# Altium PCB PCB.PcbDoc
Units mm, origin at the board's own origin, x right, y up, seen from the top; angles counter-clockwise.
Board outline 45.47 x 40.89 mm, 4 copper layers (Top Layer, Internal Plane 1, Internal Plane 2, Bottom Layer); 34 components, 42 nets, 170 pads, 22 vias.
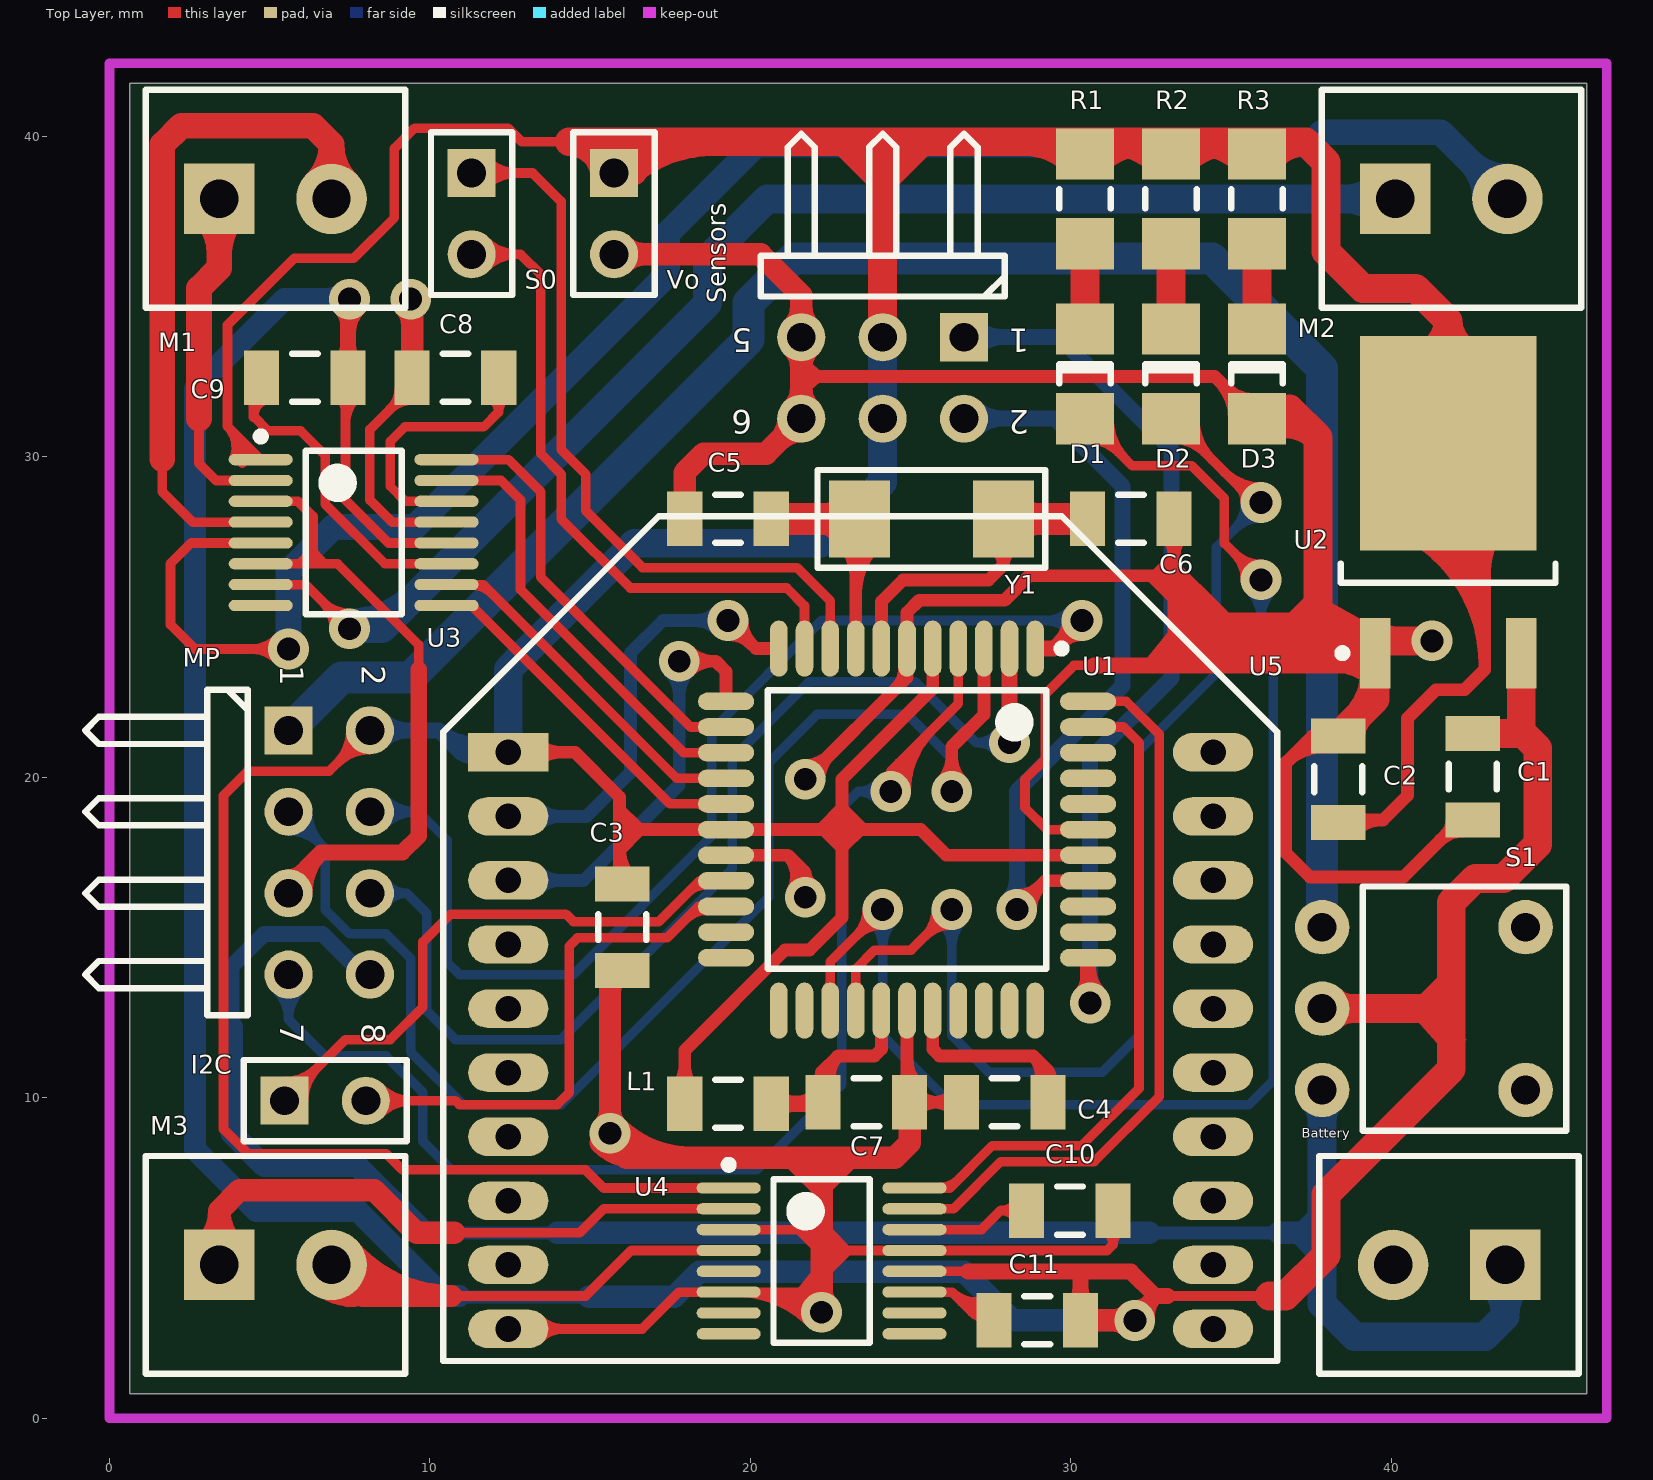
[diagram p0: Top Layer view]
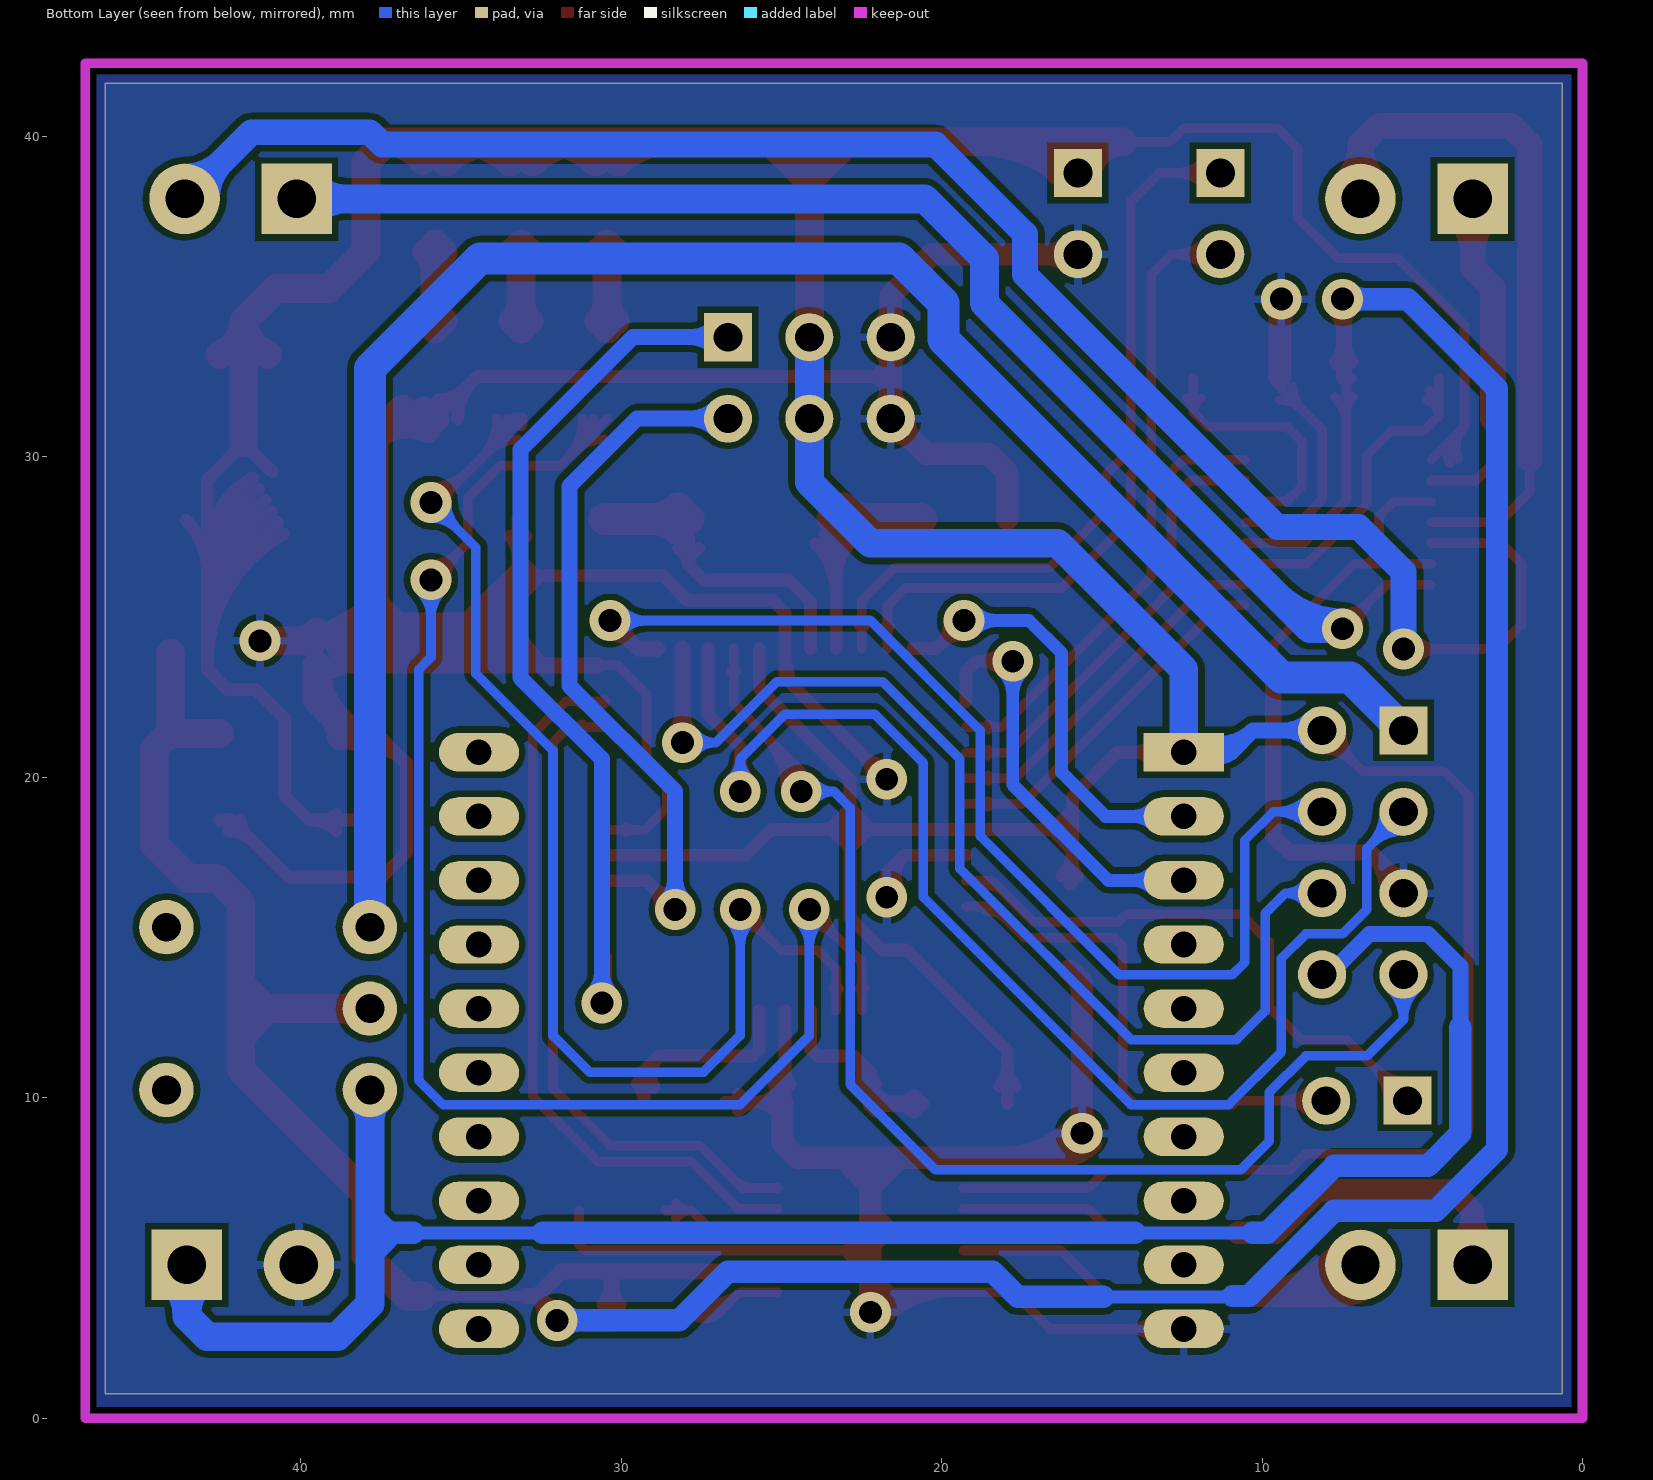
[diagram p1: Bottom Layer view, seen from below]
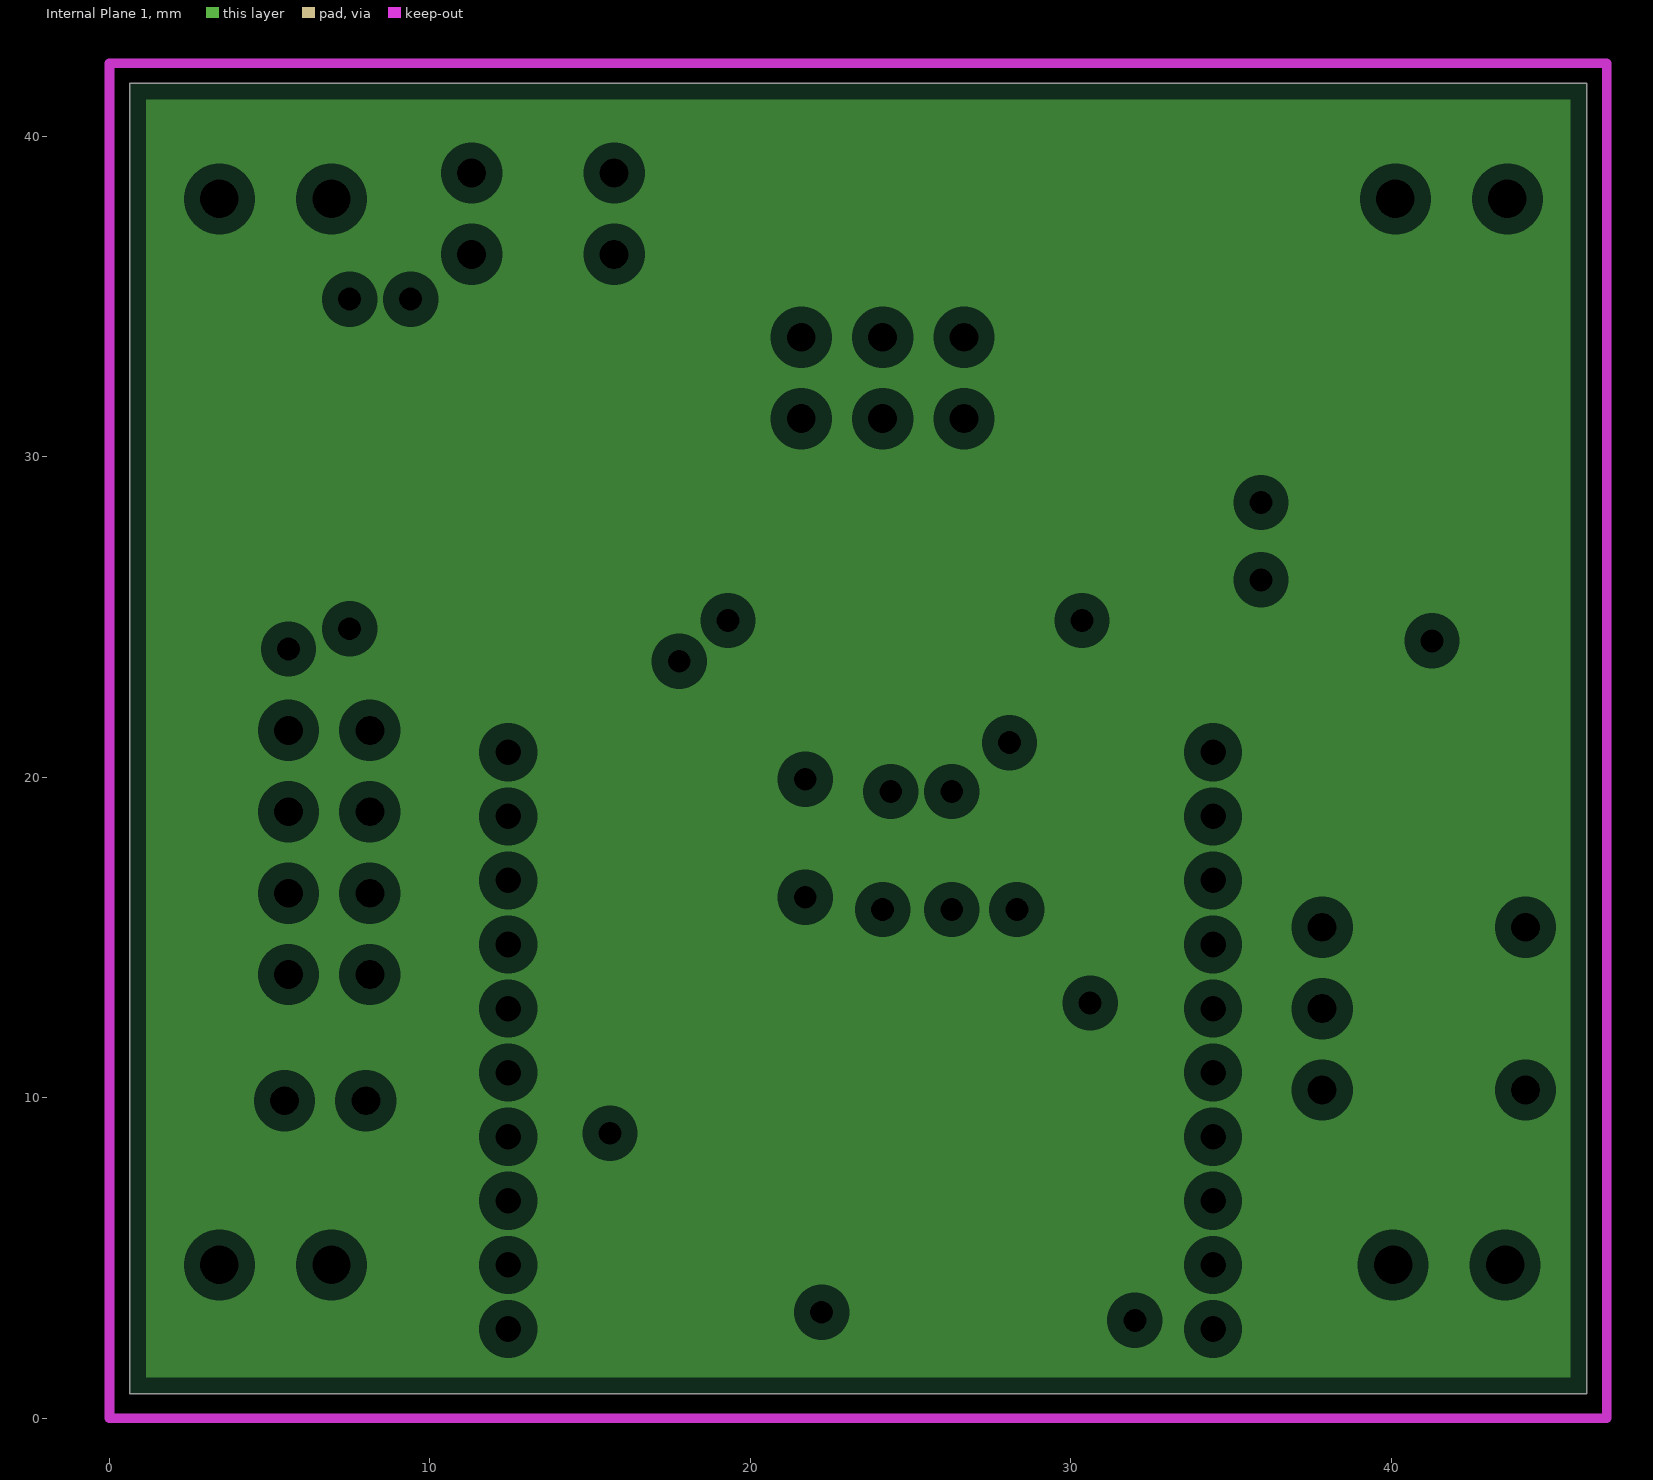
[diagram p2: Internal Plane 1, clearances drawn from the general rule]
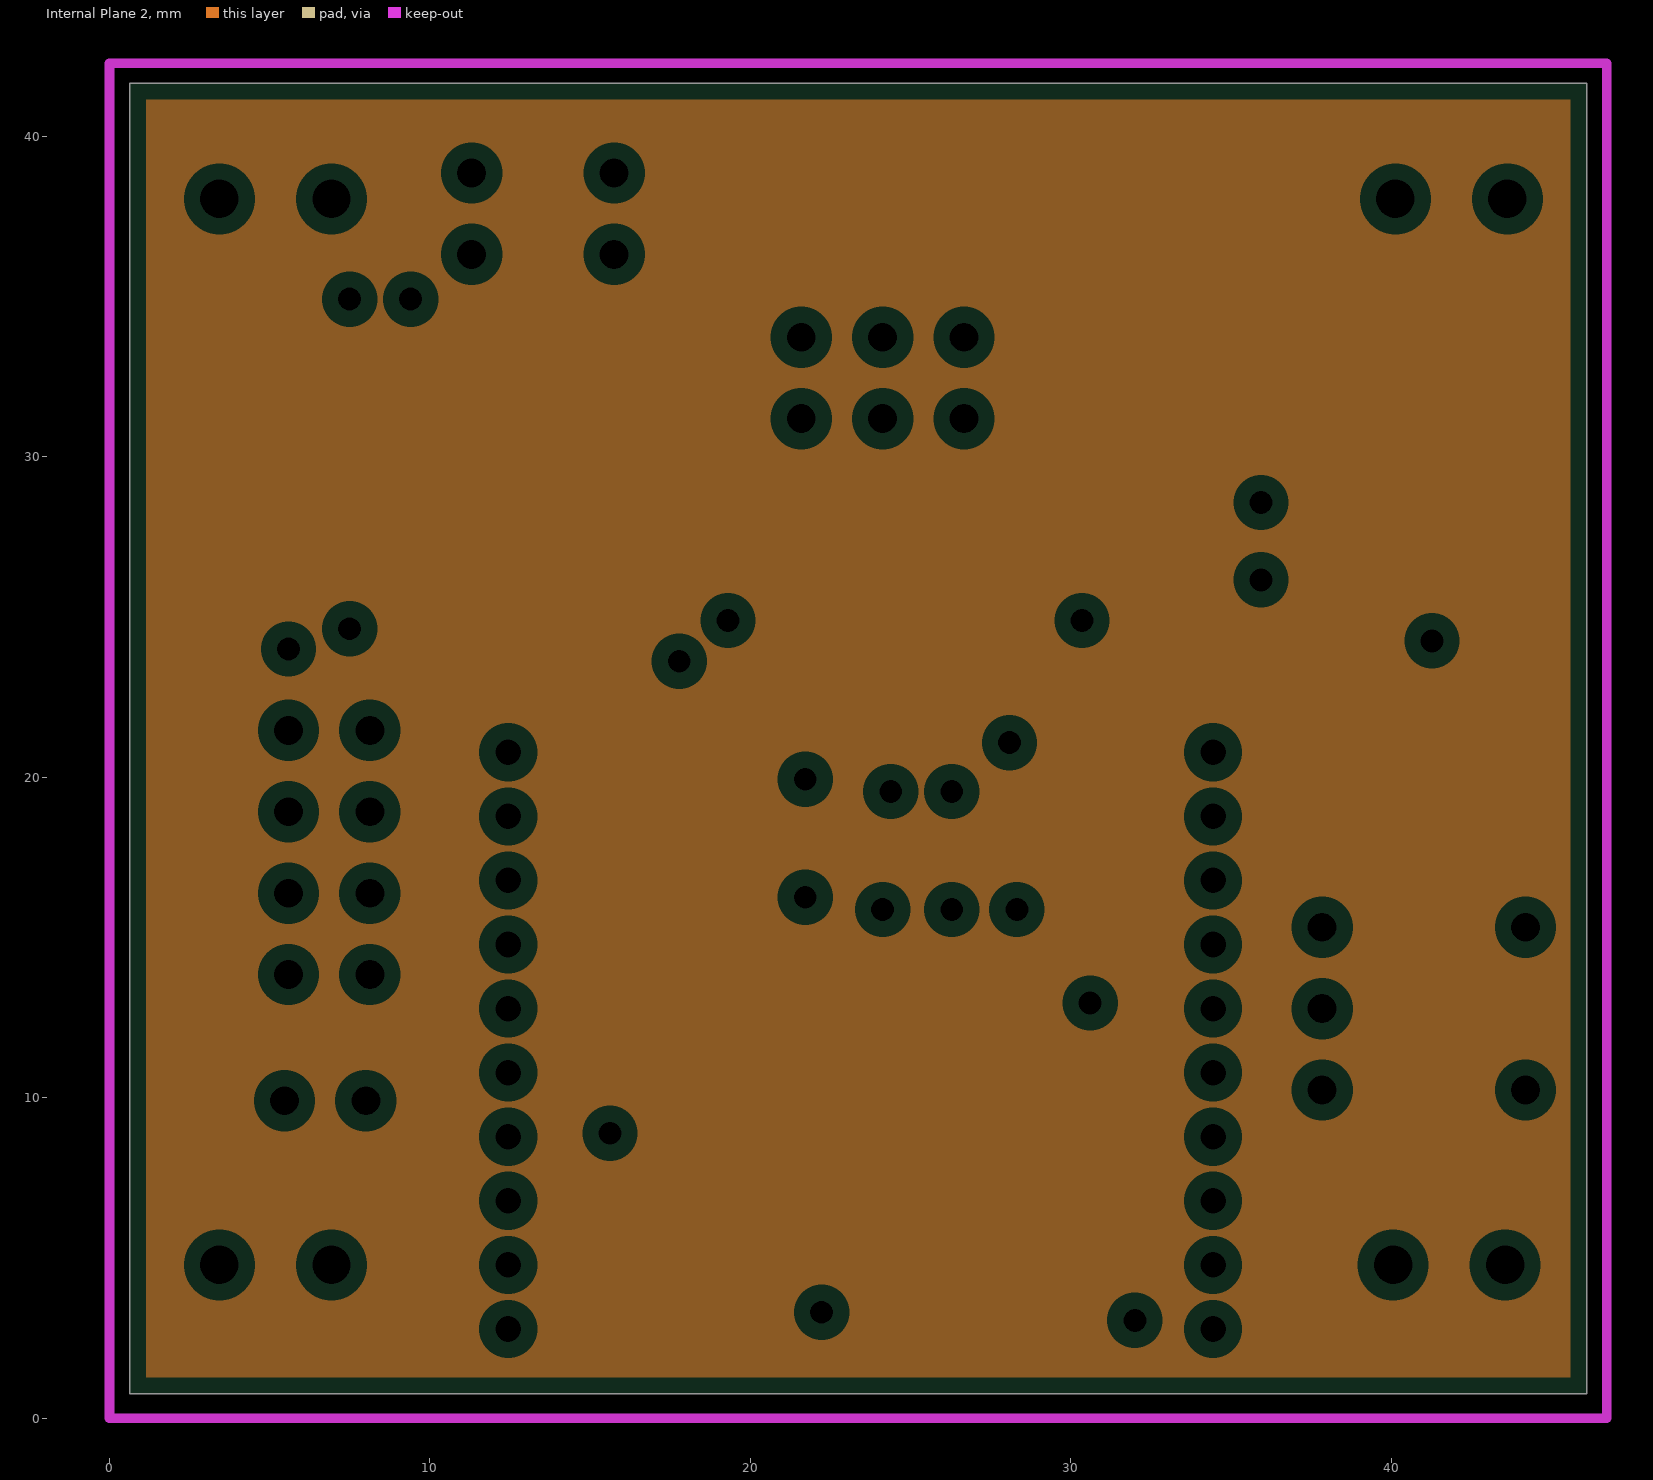
[diagram p3: Internal Plane 2, clearances drawn from the general rule]

## Layer stack, top to bottom
Top Layer: signal copper 0.0356
Dielectric: dielectric 0.32, FR-4, Dk 4.8
Internal Plane 1: plane copper 0.0356
Dielectric: dielectric 0.32, FR-4, Dk 4.8
Internal Plane 2: plane copper 0.0356
Dielectric: dielectric 0.32, FR-4, Dk 4.8
Bottom Layer: signal copper 0.0356

## Board outline
0.635,0.762 46.101,0.762 46.101,41.656 0.635,41.656

## Design rules (kind name [scope] priority, off if disabled: settings)
Clearance [All] p1: gap=0.2
ComponentClearance [All] p1 off: gap=0.254 collisioncheckmode=3 verticalgap=0.254 showdistances=FALSE
PlaneClearance [All] p1: clearance=0.508
PlaneConnect [All] p1: planeconnectstyle=Relief reliefexpansion=0.508 reliefentries=4 reliefconductorwidth=0.254 reliefairgap=0.254
PolygonConnect [All] p1: connectstyle=Relief reliefconductorwidth=0.254 reliefentries=4 polygonreliefangle="90 Angle"
RoomDefinition Schematic_v2 [InComponentClass('Schematic_v2')] p1: confinementstyle=ConfineIn formatcopy=TRUE lockcomponents=FALSE outline -1.524,0 46.736,0 46.736,42.164 -1.524,42.164
RoutingVias [All] p1: holewidth=0.6 width=1 viastyle="Through Hole" minholewidth=0.711 minwidth=1.27 maxholewidth=0.711 maxwidth=1.27
SilkscreenOverComponentPads [All] p1: minsilkscreentomaskgap=0.254
SolderMaskExpansion [All] p1: expansion=0.102
Width [All] p1: maxlimit=5 minlimit=0.3 preferedwidth=0.4 minimp=50.000000 maximp=50.000000 favimp=50.000000
24 further rules are at their usual default settings.

## Components (designator, comment, footprint, x,y, rotation, side; value= is the part's Value field where it differs from the comment)
Battery "Header 2" Terminal_2_p3.5 43.561,4.779 r180 top
C1 "Cap" C1206 42.545,20.019 r90 top
C2 "Cap" C1206 38.354,19.939 r270 top
C3 "Cap" C1206 16.002,15.32 r90 top
C4 "Cap" C1206 27.94,9.859 r180 top
C5 "Cap" C1206 19.304,28.067 r0 top
C6 "Cap" C1206 31.877,28.067 r180 top
C7 "Cap" C1206 23.622,9.859 r180 top
C8 "Cap" C1206 10.795,32.465 r180 top
C9 "Cap" C1206 6.096,32.465 r0 top
C10 "Cap" C1206 29.972,6.477 r0 top
C11 "Cap" C1206 28.956,3.048 r0 top
D1 "LED0" 1206 30.448,32.592 r270 top
D2 "LED0" 1206 33.131,32.592 r270 top
D3 "LED0" 1206 35.814,32.592 r270 top
I2C "Header 2" HDR1X2 5.461,9.906 r0 top
L1 "Inductor" C1206 19.304,9.811 r180 top
M1 "Header 2" Terminal_2_p3.5 3.429,38.053 r0 top
M2 "Header 2" Terminal_2_p3.5 40.132,38.053 r0 top
M3 "Header 2" Terminal_2_p3.5 3.429,4.779 r0 top
MP "Header 4X2H" HDR2X4H 5.588,21.463 r270 top
R1 "Res1" 8-1206 30.448,38.053 r270 top
R2 "Res1" 8-1206 33.131,38.053 r270 top
R3 "Res1" 8-1206 35.814,38.053 r270 top
S0 "Header 2" HDR1X2 11.303,38.862 r270 top
S1 "SW-SPDT" Switch_SPDT 44.196,10.24 r180 top
Sensors "Header 3X2H" HDR2X3H 26.67,33.735 r180 top
U1 "ATmega1284P-AU" 44A_N 24.892,18.368 r270 top
U2 "LD1086DT33TR" TO-252AA_M 41.783,28.274 r90 top
U3 "Dual H-Bridge Motor Driver" TSSOP16_M 7.62,27.639 r0 top
U4 "Dual H-Bridge Motor Driver" TSSOP16_M 22.225,4.906 r0 top
U5 "Xbee" Xbee_DIP 12.446,20.781 r0 top
Vo "Header 2" HDR1X2 15.748,38.862 r270 top (schematic designator Vcc_out)
Y1 "XTAL" ECX-64A 25.654,28.067 r0 top

## Footprints (in the part's own frame and the unit in brackets; to place one, negate y for a bottom-side part, rotate by r counter-clockwise, add the part's x,y. Pads: shape width x height; smd on the part's side, far side on the other; paste and mask are expansions set on the pad)
8-1206 [mm] "Chip Resistor; Body 3.1 x 1.6 mm (LxW typ)"
  rect 1.6x1.8 smd: 1(-1.4,0) 2(1.4,0)
  silkscreen extent -0.3,-0.8 0.3,0.8
44A_N [mm] "Thin QFP, 44-Leads, Body 10x10mm, Pitch 0.8mm, IPC Medium Density"
  oval 1.75x0.55 smd: 1(-5.65,4) 2(-5.65,3.2) 3(-5.65,2.4) 4(-5.65,1.6) 5(-5.65,0.8) 6(-5.65,0) 7(-5.65,-0.8) 8(-5.65,-1.6) 9(-5.65,-2.4) 10(-5.65,-3.2) 11(-5.65,-4) 23(5.65,-4) 24(5.65,-3.2) 25(5.65,-2.4) 26(5.65,-1.6) 27(5.65,-0.8) 28(5.65,0) 29(5.65,0.8) 30(5.65,1.6) 31(5.65,2.4) 32(5.65,3.2) 33(5.65,4)
  oval 0.55x1.75 smd: 12(-4,-5.65) 13(-3.2,-5.65) 14(-2.4,-5.65) 15(-1.6,-5.65) 16(-0.8,-5.65) 17(0,-5.65) 18(0.8,-5.65) 19(1.6,-5.65) 20(2.4,-5.65) 21(3.2,-5.65) 22(4,-5.65) 34(4,5.65) 35(3.2,5.65) 36(2.4,5.65) 37(1.6,5.65) 38(0.8,5.65) 39(0,5.65) 40(-0.8,5.65) 41(-1.6,5.65) 42(-2.4,5.65) 43(-3.2,5.65) 44(-4,5.65)
  silkscreen extent -5.77,-4.35 4.35,4.95, body extent -5,-5 5,5, height 1.2
1206 [mm] "Chip Capacitor; Body 3.2 x 1.6 mm (LxW typ)"
  rect 1.6x1.8 smd: 1(-1.4,0) 2(1.4,0)
  silkscreen extent -0.3,-0.8 0.3,0.8
C1206 [mm] "Chip Capacitor, Body 3.2x1.6mm, IPC High Density"
  rect 1.1x1.7 smd: 1(-1.35,0) 2(1.35,0)
  silkscreen extent -0.4,-0.75 0.4,0.75, body extent -1.7,-0.9 1.7,0.9, height 1.3
ECX-64A [mm]
  rect 1.9x2.4 smd: 1(-2.25,0) 2(2.25,0)
  silkscreen extent -3.56,-1.52 3.56,1.52
HDR1X2 [mm] "Connector; Header; 2 Position"
  rect 1.5x1.5 hole 0.9: 1(0,0)
  round 1.5 hole 0.9: 2(2.54,0)
  silkscreen extent -1.27,-1.27 3.81,1.27
HDR2X3H [mm] "Connector; Header; 3x2 Position; Right Angle"
  rect 1.5x1.5 hole 0.9: 1(0,0)
  round 1.5 hole 0.9: 2(0,2.54) 3(2.54,0) 4(2.54,2.54) 5(5.08,0) 6(5.08,2.54)
  silkscreen extent -1.27,-6.35 6.35,-1.27
HDR2X4H [mm] "Connector; Header; 4x2 Position; Right Angle"
  rect 1.5x1.5 hole 0.9: 1(0,0)
  round 1.5 hole 0.9: 2(0,2.54) 3(2.54,0) 4(2.54,2.54) 5(5.08,0) 6(5.08,2.54) 7(7.62,0) 8(7.62,2.54)
  silkscreen extent -1.27,-6.35 8.89,-1.27
Switch_SPDT [mm] "GT11MABE"
  round 1.7 hole 0.9: 0(0,0) 0(0,-5.08) 1(6.35,-5.08) 2(6.35,-2.54) 3(6.35,0)
  silkscreen extent -1.27,-6.35 5.08,1.27
Terminal_2_p3.5 [mm]
  rect 2.2x2.2 hole 1.2: 1(0,0)
  round 2.2 hole 1.2: 2(3.5,0)
  silkscreen extent -2.3,-3.4 5.8,3.4
TO-252AA_M [mm] "D-PAK, 4-Leads, Body 6.1x6.5mm, Pitch 2.28mm, Lead Span 9.8mm, IPC Low Density"
  rect 2.2x0.95 smd: 1(-4.4,2.28) 3(-4.4,-2.28)
  rect 6.7x5.5 smd: 4(2.15,0)
  silkscreen extent -4.52,-3.35 -1.6,3.43, body extent -2.2,-3.35 4,3.35, height 2.38
TSSOP16_M [mm] "TSOP, 16-Leads, Body 5x4.4mm, Pitch 0.65mm, IPC Low Density"
  oval 2x0.35 smd: 1(-2.9,2.275) 2(-2.9,1.625) 3(-2.9,0.975) 4(-2.9,0.325) 5(-2.9,-0.325) 6(-2.9,-0.975) 7(-2.9,-1.625) 8(-2.9,-2.275) 9(2.9,-2.275) 10(2.9,-1.625) 11(2.9,-0.975) 12(2.9,-0.325) 13(2.9,0.325) 14(2.9,0.975) 15(2.9,1.625) 16(2.9,2.275)
  silkscreen extent -3.02,-2.55 1.5,3.12, body extent -2.25,-2.55 2.25,2.55, height 1.1
Xbee_DIP [mm]
  rect 2.5x1.2 hole 0.8: 1(0,0)
  oval 2.5x1.2 hole 0.8: 2(0,-2) 3(0,-4) 4(0,-6) 5(0,-8) 6(0,-10) 7(0,-12) 8(0,-14) 9(0,-16) 10(0,-18) 11(22,-18) 12(22,-16) 13(22,-14) 14(22,-12) 15(22,-10) 16(22,-8) 17(22,-6) 18(22,-4) 19(22,-2) 20(22,0)
  silkscreen extent -2.03,-19 24,7.37

## Part data
Battery I2C M1 M2 M3 S0 Vo: "Header, 2-Pin"
C1 C2 C3 C4 C5 C6 C7 C8 C9 C10 C11: "Capacitor"
D1 D2 D3: "Typical INFRARED GaAs LED"
MP: "Header, 4-Pin, Dual row, Right Angle"
R1 R2 R3: "Resistor"
S1: "SPDT Subminiature Toggle Switch, Right Angle Mounting, Vertical Actuation"
Sensors: "Header, 3-Pin, Dual row, Right Angle"
U1: "20 MHz 8-bit AVR Microcontroller with 128KB Flash, 44-Pin TQFP Pkg, Industrial Temp"
U2: library part "Volt Reg", "Voltage Regulator"
U3 U4: library part DRV8833
Y1: "Crystal"

## Via types
v1: diameter 1.27, hole 0.711, Top Layer to Bottom Layer, 22 vias

## Nets (pads, with @x,y where several pads share a name; then routed paths per layer and width w, separated by ;. In a path a pad name is that pad's centre, name@x,y a point inside that pad or via, vN(x,y) a via of type N, cw(c..) or ccw(c..) an arc to the next point about the centre after c; other vN are vias at no path point)
BATTERY: Battery.1 MP.8 S1.3 | length 64.5
  Bottom Layer w0.4: 10.287,5.781 13.97,5.781 ; 32.446,5.781 36.5,5.781
  Bottom Layer w0.5: 3.81,12.192 3.81,14.097 4.826,15.113 6.644,15.113 7.914,13.843 MP.8
  Bottom Layer w0.7: 3.81,12.192 3.81,8.89 4.826,7.874 7.747,7.874 9.84,5.781 10.287,5.781 ; 13.97,5.781 32.446,5.781 ; 36.5,5.781 37.846,5.781
  Bottom Layer w0.9: S1.3@37.563,9.957 cw(c36.88,9.274) 37.846,9.274 cw(c38.812,9.274) S1.3@38.129,9.957 ; S1.3 37.846,3.556 38.862,2.54 42.926,2.54 43.561,3.175 Battery.1 ; Battery.1@43.101,4.319 cw(c41.992,3.21) 43.561,3.21 cw(c45.13,3.21) Battery.1@44.021,4.319
GND: Battery.2 C1.1 C2.1 C3.1 C4.2 C5.1 C6.1 C7.1 C8.2 C10.2 D3.2 MP.5 Sensors.5 Sensors.6 U1.6 U1.18 U1.28 U1.39 U2.1 U3.3 U3.6 U3.13 U4.3 U4.6 U4.13 U5.10 Vo.2 | length 228.4
  Top Layer w0.3: U3.6 7.118,26.664 9.652,24.13 9.652,23.368 ; U3.3 5.883,28.614 6.35,28.147 6.35,26.664 ; 8.74,31.473 cw(c9.445,30.768) C8.2@9.445,31.765 ; 8.771,31.504 ccw(c8.111,32.165) C8.2@9.045,32.165 ; C8.2 9.445,32.178 8.128,30.861 8.128,28.655 8.819,27.964 U3.13 ; U5.10 16.624,2.781 17.774,3.931 U4.6 v1@22.225,3.931 ; U5.10@13.414,2.463 cw(c14.182,1.695) 14.182,2.781 cw(c14.182,3.867) U5.10@13.414,3.099 ; U4.3 22.225,5.881 ; U4.6@19.536,3.931 cw(c19.536,0.613) v1@21.882,2.959 ; U4.6@20.26,3.931 cw(c20.26,1.337) v1@22.094,3.171 ; 20.984,3.931 cw(c20.984,2.061) v1@22.306,3.383 ; 21.708,3.931 cw(c21.708,2.785) v1@22.518,3.595 ; 22.225,5.231 U4.13 31.139,5.231 31.322,5.414 ; U1.39@29.854,18.28 ccw(c29.64,18.066) 29.64,18.368 ccw(c29.64,18.67) U1.39@29.854,18.456 ; U1.39 29.257,18.368 28.575,19.05 28.575,19.939 29.21,20.574 29.21,22.606 30.099,23.495 30.734,23.495 ; C10.2@31.094,5.848 cw(c30.794,5.414) 31.322,5.414 ; C10.2 31.322,5.414 ; C10.2@31.55,5.848 ccw(c31.85,5.414) 31.322,5.414
  Top Layer w0.4: U1.18 21.167,17.568 ; v1@21.333,16.46 ccw(c20.501,16.902) 21.167,17.568 ; v1@21.496,16.631 ccw(c21.267,17.018) 21.717,17.018 ; 21.549,17.186 cw(c21,16.637) v1@21.686,16.272 ; 21.59,32.512 34.494,32.512 D3.2 ; v1(21.717,16.256) 21.717,17.018 ; v1(21.717,19.939) 24.892,23.114 U1.6 24.892,25.146 25.273,25.527 27.94,25.527 28.702,26.289 33.227,26.289 ; v1@21.717,20.374 ccw(c21.717,21.424) 22.46,20.682 ccw(c23.202,19.939) v1@22.152,19.939 ; v1@21.938,16.631 cw(c22.167,17.018) 21.717,17.018 ; 24.549,22.771 ccw(c23.902,23.418) U1.6@24.817,23.418 ; C7.1@24.725,10.406 ccw(c24.32,10.811) 24.892,10.811 ; 24.892,11.197 ccw(c26.01,11.197) C7.1@25.219,10.406 ; U1.28 24.892,9.939 C7.1 C4.2 C4.2@26.75,9.859 ; C7.1@25.219,9.612 cw(c25.817,9.014) 25.817,9.859 cw(c25.817,10.704) C7.1@25.219,10.106 ; C4.2@26.343,9.612 ccw(c25.745,9.014) 25.745,9.859 ccw(c25.745,10.704) C4.2@26.343,10.106 ; C6.1@32.98,27.52 cw(c32.382,26.922) 33.227,26.922 cw(c34.072,26.922) C6.1@33.474,27.52 ; 33.227,23.749 C6.1 ; 34.619,32.387 cw(c33.424,31.192) D3.2@35.114,31.192 ; 34.86,32.146 ccw(c35.714,32.999) D3.2@35.714,31.792 ; 37.321,21.065 cw(c37.989,20.397) C2.1@38.058,21.339 ; C2.1@38.028,20.94 ccw(c37.904,19.246) 36.703,20.447 ; C2.1 37.545,21.289 36.703,20.447 ; 41.509,18.014 cw(c42.245,17.278) C1.1@42.245,18.319 ; C1.1@41.705,18.21 ccw(c41.246,18.669) C1.1@41.895,18.669 ; C1.1 42.164,18.669 40.386,16.891 37.465,16.891 36.703,17.653 36.703,20.447 ; 21.167,17.568 21.717,17.018
  Top Layer w0.5: MP.5 5.588,16.637 6.604,17.653 ; MP.5@5.588,16.883 ccw(c5.588,17.477) 6.008,17.057 ; MP.5@6.088,16.388 cw(c7.85,16.407) 6.604,17.653 ; 9.652,23.368 9.652,18.161 9.144,17.653 6.604,17.653 ; 30.734,23.495 U2.1@39.503,23.495 ; 38.366,23.495 cw(c38.366,22.112) U2.1@39.344,23.09
  Top Layer w0.7: v1@9.196,34.723 cw(c8.596,34.123) 9.445,34.123 ; C8.2 v1@9.445,34.878 ; v1@15.328,8.597 ccw(c16.459,9.728) 16.459,8.128 ; v1@15.419,9.092 ccw(c14.933,9.578) 15.621,9.578 ccw(c16.309,9.578) 15.823,9.092 ccw(c18.149,11.418) 18.149,8.128 ; 15.621,13.292 cw(c16.38,13.292) C3.1@15.843,13.829 ; Vo.2 20.32,36.322 21.59,35.052 Sensors.5 21.59,32.512 Sensors.6 20.494,30.099 18.542,30.099 17.954,29.511 C5.1 ; v1@15.902,8.842 ccw(c16.705,8.704) 16.129,8.128 ; C3.1 15.621,13.589 v1(15.621,8.89) 15.621,8.636 16.129,8.128 ; Vo.2@16.031,36.039 cw(c16.714,35.356) 16.714,36.322 cw(c16.714,37.288) Vo.2@16.031,36.605 ; Sensors.6@21.19,31.195 cw(c20.224,31.195) 20.907,30.512 cw(c21.59,29.829) Sensors.6@21.59,30.795 ; Sensors.6@21.307,31.478 ccw(c20.624,32.161) 21.59,32.161 ccw(c22.556,32.161) Sensors.6@21.873,31.478 ; Sensors.5@21.307,33.452 cw(c20.624,32.769) 21.59,32.769 cw(c22.556,32.769) Sensors.5@21.873,33.452 ; Sensors.5@21.307,34.018 ccw(c20.624,34.701) 21.59,34.701 ccw(c22.556,34.701) Sensors.5@21.873,34.018 ; v1@22.023,3.504 ccw(c21.537,3.99) 22.225,3.99 ccw(c22.913,3.99) v1@22.427,3.504 ; v1(22.225,3.302) 22.225,8.128 ; C7.1 24.972,8.589 24.511,8.128 22.225,8.128 ; 16.129,8.128 22.225,8.128
  Top Layer w0.9: D3.2 37.134,31.192 ; D3.2@36.069,30.878 cw(c36.705,29.593) 37.719,30.607 ; D3.2@36.161,30.945 cw(c36.759,30.347) 36.759,31.192 cw(c36.759,32.037) D3.2@36.161,31.439 ; 36.832,31.494 37.719,30.607 ; 37.719,23.749 37.719,30.607 ; C2.1 39.503,22.438 U2.1@39.503,23.495 ; C2.1@38.754,21.289 cw(c39.72,21.289) 39.037,21.972 ; C2.1@38.887,21.822 ccw(c37.46,23.249) U2.1@39.478,23.249 ; U2.1@39.497,24.384 39.624,24.257 v1(41.275,24.257) ; U2.1@39.521,24.517 ccw(c40.148,25.144) 40.148,24.257
  other v1: 9.398,34.925
LED1: D1.2 U1.25 | length 56.5
  Top Layer w0.3: U1.25@22.404,13.406 ccw(c22.19,13.62) 22.492,13.62 ccw(c22.794,13.62) U1.25@22.58,13.406 ; U1.25 22.492,14.237 v1(24.13,15.875) ; v1@23.645,15.875 cw(c22.474,15.875) 23.302,15.047 cw(c24.13,14.219) v1@24.13,15.39 ; D1.2 31.922,29.718 33.782,29.718 34.798,28.702 34.798,27.305 v1(35.941,26.162) ; D1.2@30.548,30.542 cw(c30.548,29.214) 31.487,30.153 ; D1.2@30.898,31.192 ccw(c31.985,31.192) D1.2@31.216,30.424 ; D1.2@31.198,31.192 ccw(c33.009,31.192) 31.729,29.912 ; v1@35.456,26.162 ccw(c34.285,26.162) 35.113,26.99 ccw(c35.941,27.818) v1@35.941,26.647
  Bottom Layer w0.3: v1@23.787,15.532 cw(c22.959,14.704) 24.13,14.704 cw(c25.301,14.704) v1@24.473,15.532 ; v1(24.13,15.875) 24.13,11.938 26.289,9.779 35.56,9.779 36.322,10.541 36.322,23.368 35.941,23.749 v1(35.941,26.162) ; v1@35.598,25.819 cw(c34.77,24.991) 35.941,24.991 cw(c37.112,24.991) v1@36.284,25.819
LED2: D2.2 U1.26 | length 50.1
  Top Layer w0.3: U1.26@23.204,13.406 ccw(c22.99,13.62) 23.292,13.62 ccw(c23.594,13.62) U1.26@23.38,13.406 ; U1.26 23.292,14.021 23.876,14.605 25.019,14.605 v1(26.289,15.875) ; v1@25.804,15.875 cw(c24.633,15.875) 25.461,15.047 cw(c26.289,14.219) v1@26.289,15.39 ; D2.2 35.748,28.575 v1(35.941,28.575) ; D2.2@33.231,30.542 cw(c33.231,29.214) 34.17,30.153 ; D2.2@33.581,31.192 ccw(c34.668,31.192) D2.2@33.899,30.424 ; D2.2@33.881,31.192 ccw(c35.692,31.192) 34.411,29.912 ; 34.784,29.539 ccw(c35.941,30.697) v1@35.941,29.06 ; 35.249,29.074 cw(c34.751,28.575) v1@35.456,28.575 ; 35.296,29.027 ccw(c35.941,29.672) v1@35.941,28.76
  Top Layer w0.4: D2.2@33.131,31.004 D2.2 D2.2@33.324,31.192
  Bottom Layer w0.3: v1@25.946,15.532 cw(c25.118,14.704) 26.289,14.704 cw(c27.46,14.704) v1@26.632,15.532 ; v1(26.289,15.875) 26.289,11.938 27.432,10.795 30.988,10.795 32.131,11.938 32.131,20.828 34.544,23.241 34.544,27.178 v1(35.941,28.575) ; v1@35.456,28.575 cw(c34.285,28.575) 35.113,27.747 cw(c35.941,26.919) v1@35.941,28.09
MISO: MP.6 U1.2 | length 38.5
  Top Layer w0.5: v1@27.82,21.354 ccw(c27.163,22.011) 28.092,22.011 ccw(c29.021,22.011) v1@28.364,21.354 ; v1(28.092,21.082) U1.2
  Bottom Layer w0.3: MP.6 9.271,16.383 ; MP.6@8.622,16.042 cw(c9.271,15.594) 9.271,16.383 ; MP.6@8.622,16.724 ccw(c9.271,17.172) 9.271,16.383 ; v1@27.721,20.77 ccw(c27.051,20.207) 27.051,21.082 ; v1@27.721,21.394 cw(c27.051,21.957) 27.051,21.082 ; v1(28.092,21.082) 27.051,21.082 ; 9.271,16.383 9.906,15.748 9.906,12.7 10.795,11.811 14.097,11.811 19.431,17.145 19.431,20.574 21.844,22.987 25.146,22.987 27.051,21.082
MOSI: MP.4 U1.1 | length 40.5
  Top Layer w0.5: U1.1@28.907,24.003 U1.1 29.479,24.018 v1(30.353,24.892) ; v1@29.968,24.892 cw(c29.039,24.892) 29.696,24.235 cw(c30.353,23.578) v1@30.353,24.507
  Bottom Layer w0.3: MP.4 9.652,18.923 10.541,18.034 10.541,14.224 10.934,13.831 14.466,13.831 18.796,18.161 18.796,21.463 22.225,24.892 v1(30.353,24.892) ; MP.4@8.552,18.499 cw(c9.577,17.474) 9.577,18.923 cw(c9.577,20.372) MP.4@8.552,19.347 ; v1@30.01,24.549 ccw(c29.182,23.721) 29.182,24.892 ccw(c29.182,26.063) v1@30.01,25.235
MOTOR1_A: U1.14 U3.15 | length 14.4
  Top Layer w0.3: U3.15 12.218,29.264 12.827,28.655 12.827,25.861 17.92,20.768 U1.14 ; U1.14@18.554,20.68 ccw(c18.34,20.466) 18.34,20.768 ccw(c18.34,21.07) U1.14@18.554,20.856
MOTOR1_B: U1.13 U3.16 | length 14.2
  Top Layer w0.3: U3.16 12.457,29.914 13.462,28.909 13.462,26.242 18.136,21.568 U1.13 ; U1.13@18.554,21.48 ccw(c18.34,21.266) 18.34,21.568 ccw(c18.34,21.87) U1.13@18.554,21.656
MOTOR2_A: U1.16 U3.9 | length 11.8
  Top Layer w0.3: U3.9 11.292,25.364 17.488,19.168 U1.16 ; U1.16@18.554,19.08 ccw(c18.34,18.866) 18.34,19.168 ccw(c18.34,19.47) U1.16@18.554,19.256
MOTOR2_B: U1.15 U3.10 | length 12.3
  Top Layer w0.3: U3.10 11.658,26.014 17.704,19.968 U1.15 ; U3.10@11.345,25.989 cw(c11.345,25.173) 11.922,25.75 ; U1.15@18.554,19.88 ccw(c18.34,19.666) 18.34,19.968 ccw(c18.34,20.27) U1.15@18.554,20.056
MOTOR3_A: U1.43 U4.16 | length 21.9
  Top Layer w0.3: U4.16 26.231,7.181 27.551,8.501 30.345,8.501 32.131,10.287 32.131,21.082 31.645,21.568 U1.43 ; U4.16@25.95,7.206 ccw(c25.95,7.945) 26.472,7.422 ; U1.43@31.23,21.48 cw(c31.444,21.266) 31.444,21.568 cw(c31.444,21.87) U1.43@31.23,21.656
MOTOR3_B: U1.44 U4.15 | length 23.5
  Top Layer w0.3: U4.15 26.343,6.531 27.813,8.001 30.734,8.001 32.766,10.033 32.766,21.336 31.734,22.368 U1.44 ; U1.44@31.23,22.28 cw(c31.444,22.066) 31.444,22.368 cw(c31.444,22.67) U1.44@31.23,22.456
  Top Layer w0.4: U1.44 U1.44@30.558,22.352
NetC4_1: C4.1 U1.29 | length 8.9
  Top Layer w0.4: U1.29 25.692,11.519 25.908,11.303 28.829,11.303 ; C4.1@28.98,10.321 ccw(c28.235,10.709) 28.829,11.303 ; C4.1@29.086,10.443 ccw(c28.799,10.842) 29.29,10.842 ; 29.214,10.918 cw(c28.742,10.445) C4.1@29.334,10.136 ; C4.1 29.29,10.842 ; C4.1@29.494,10.443 cw(c29.781,10.842) 29.29,10.842 ; 28.829,11.303 29.29,10.842
NetC5_2: C5.2 U1.8 Y1.1 | length 15.8
  Top Layer w0.4: 21.89,27.94 ccw(c21.89,29.331) Y1.1@22.874,28.347 ; Y1.1@22.784,27.395 ccw(c21.753,26.692) 21.753,27.94 22.86,27.94 23.292,27.508 U1.8 ; Y1.1@22.874,27.287 cw(c21.864,26.277) 23.292,26.277 ; 23.292,25.736 cw(c25.485,25.736) Y1.1@23.934,27.287 ; 23.292,26.702 cw(c24.519,26.702) Y1.1@23.651,27.57
  Top Layer w1: C5.2 Y1.1 ; Y1.1@23.086,27.749 ccw(c22.318,26.981) 22.318,28.067 ccw(c22.318,29.153) Y1.1@23.086,28.385
NetC6_2: C6.2 U1.7 Y1.2 | length 12.8
  Top Layer w0.4: U1.7 24.092,25.489 24.765,26.162 27.432,26.162 27.904,26.634 ; Y1.2@27.584,27.139 cw(c27.346,26.634) 27.904,26.634 ; Y1.2 27.904,26.634 ; Y1.2@28.224,27.139 ccw(c28.462,26.634) 27.904,26.634
  Top Layer w1: Y1.2 C6.2 ; Y1.2@28.222,27.749 cw(c28.99,26.981) 28.99,28.067 cw(c28.99,29.153) Y1.2@28.222,28.385
NetC7_2: C7.2 L1.1 U1.27 | length 10.9
  Top Layer w0.4: C7.2@22.051,10.43 ccw(c21.755,10.794) 22.224,10.794 ; C7.2@22.224,9.811 22.224,10.794 ; C7.2@22.228,10.136 cw(c22.82,10.445) 22.348,10.918 ; C7.2@22.424,10.474 cw(c22.578,10.794) 22.224,10.794 ; C7.2@22.582,10.321 cw(c23.327,10.709) 22.733,11.303 ; U1.27 24.092,11.519 23.876,11.303 22.733,11.303 ; 22.224,10.794 22.733,11.303
  Top Layer w0.5: L1.1 C7.2@22.224,9.811 ; L1.1@20.866,9.598 cw(c21.378,9.086) 21.378,9.811 cw(c21.378,10.535) L1.1@20.866,10.023 ; 21.431,9.811 ccw(c21.431,10.7) C7.2@22.06,10.071 ; 21.665,9.811 cw(c21.665,9.252) C7.2@22.06,9.647
NetC8_1: C8.1 U3.14 | length 9.2
  Top Layer w0.3: U3.14 9.232,28.614 8.763,29.083 8.763,30.48 9.224,30.941 11.684,30.941 12.145,31.402 ; C8.1@11.917,31.836 cw(c11.617,31.402) 12.145,31.402 ; C8.1 12.145,31.402 ; C8.1@12.373,31.836 ccw(c12.673,31.402) 12.145,31.402
NetC9_1: C9.1 U3.11 | length 11.3
  Top Layer w0.3: 4.492,31.239 cw(c5.074,31.239) C9.1@4.88,31.788 ; C9.1@4.492,31.664 cw(c4.923,31.664) C9.1@4.779,32.071 ; C9.1@4.492,32.465 4.492,31.275 4.953,30.814 5.969,30.814 6.731,30.052 6.731,28.528 8.595,26.664 U3.11
NetC10_1: C10.1 U4.14 | length 4.9
  Top Layer w0.3: U4.14 27.217,5.881 27.813,6.477 ; C10.1@28.304,6.234 ccw(c27.813,5.859) 27.813,6.477 ; C10.1@28.304,6.72 cw(c27.813,7.095) 27.813,6.477 ; C10.1 27.813,6.477
NetC11_1: C11.1 U4.11 | length 6.6
  Top Layer w0.3: U4.11 26.295,3.931 ; 26.606,3.62 ccw(c27.218,4.233) C11.1@27.566,3.44 ; 26.916,3.31 ccw(c27.407,3.801) C11.1@27.686,3.165 ; C11.1@27.24,3.508 cw(c26.924,3.646) 26.924,3.302 ; C11.1@27.279,3.118 ccw(c26.924,2.868) 26.924,3.302 ; C11.1@27.445,3.714 cw(c27.029,4.665) 26.295,3.931 ; C11.1@27.559,3.302 26.924,3.302 ; 26.295,3.931 26.924,3.302
NetD1_1: D1.1 R1.2 | length 5.3
  Top Layer w0.9: D1.1@30.201,34.239 ccw(c29.603,34.837) 30.448,34.837 ccw(c31.293,34.837) D1.1@30.696,34.239 ; R1.2@30.201,36.406 cw(c29.603,35.808) 30.448,35.808 cw(c31.293,35.808) R1.2@30.696,36.406 ; D1.1 R1.2
NetD2_1: D2.1 R2.2 | length 5.3
  Top Layer w0.9: D2.1@32.884,34.239 ccw(c32.286,34.837) 33.131,34.837 ccw(c33.976,34.837) D2.1@33.379,34.239 ; R2.2@32.884,36.406 cw(c32.286,35.808) 33.131,35.808 cw(c33.976,35.808) R2.2@33.379,36.406 ; D2.1 R2.2
NetD3_1: D3.1 R3.2 | length 5.3
  Top Layer w0.9: D3.1@35.567,34.239 ccw(c34.969,34.837) 35.814,34.837 ccw(c36.659,34.837) D3.1@36.061,34.239 ; R3.2@35.567,36.406 cw(c34.969,35.808) 35.814,35.808 cw(c36.659,35.808) R3.2@36.061,36.406 ; D3.1 R3.2
NetI2C_1: I2C.1 U1.19 | length 20.9
  Top Layer w0.3: I2C.1 7.366,11.811 8.763,11.811 9.779,12.827 9.779,14.859 10.651,15.731 14.241,15.731 14.478,15.494 17.145,15.494 18.419,16.768 U1.19 ; I2C.1@5.461,10.506 ccw(c5.461,11.955) 6.485,10.93 ccw(c7.51,9.906) I2C.1@6.061,9.906 ; 18.048,16.397 cw(c18.642,15.803) U1.19@18.642,16.643
NetI2C_2: I2C.2 U1.20 | length 19.5
  Top Layer w0.3: I2C.2 10.795,9.906 10.922,9.779 13.97,9.779 14.351,10.16 14.351,14.732 14.605,14.986 17.399,14.986 18.381,15.968 U1.20 ; I2C.2@8.425,9.482 cw(c9.45,8.457) 9.45,9.906 cw(c9.45,11.355) I2C.2@8.425,10.33 ; 17.983,15.57 cw(c18.642,14.911) U1.20@18.642,15.843
NetM1_1: M1.1 U3.2 | length 13.3
  Top Layer w0.3: 2.794,31.195 2.794,29.798 3.328,29.264 U3.2
  Top Layer w0.8: 2.794,31.195 2.794,35.259 3.429,35.894 M1.1 ; M1.1@2.934,37.558 cw(c1.739,36.363) 3.429,36.363 cw(c5.119,36.363) M1.1@3.924,37.558
NetM1_2: M1.2 U3.4 | length 24.4
  Top Layer w0.3: 1.651,29.925 1.651,28.909 2.596,27.964 U3.4
  Top Layer w0.8: 1.651,29.925 1.651,39.751 2.239,40.339 6.35,40.339 6.929,39.76 M1.2 ; M1.2@6.434,38.548 ccw(c5.239,39.743) 6.929,39.743 ccw(c8.619,39.743) M1.2@7.424,38.548
NetM2_1: M2.1 U3.7 | length 48.9
  Top Layer w0.3: U3.7 6.117,26.014 v1(7.493,24.638) ; v1@7.008,24.638 ccw(c5.837,24.638) 6.665,25.466 ccw(c7.493,26.294) v1@7.493,25.123
  Bottom Layer w0.9: v1(7.493,24.638) 8.509,24.638 18.669,34.798 18.669,36.195 20.527,38.053 M2.1 ; v1@7.493,24.823 ccw(c7.493,27.722) 9.543,25.672 ; M2.1@39.672,37.593 ccw(c38.563,36.484) 38.563,38.053 ccw(c38.563,39.622) M2.1@39.672,38.513
NetM2_2: M2.2 U3.5 | length 61.2
  Top Layer w0.3: U3.5 2.549,27.314 1.905,26.67 1.905,24.765 2.667,24.003 v1(5.588,24.003) ; v1@5.245,23.66 ccw(c4.417,22.832) 4.417,24.003 ccw(c4.417,25.174) v1@5.245,24.346
  Bottom Layer w0.8: v1(5.588,24.003) 5.588,26.416 6.985,27.813 9.525,27.813 17.399,35.687 17.399,36.957 20.193,39.751 37.465,39.751 37.846,40.132 41.553,40.132 M2.2 ; M2.2@42.932,38.053 ccw(c41.242,38.053) 42.437,39.248 ccw(c43.632,40.443) M2.2@43.632,38.753
NetM3_1: M3.1 U4.2 | length 21.3
  Top Layer w0.3: 10.755,5.781 14.671,5.781 15.421,6.531 U4.2
  Top Layer w0.7: M3.1@2.924,5.333 ccw(c1.882,6.477) 3.429,6.477 ; M3.1 3.429,6.477 ; M3.1@3.934,5.333 cw(c4.976,6.477) 3.429,6.477 ; 10.755,5.781 9.586,5.781 8.255,7.112 4.064,7.112 3.429,6.477
NetM3_2: M3.2 U4.4 | length 22.6
  Top Layer w0.3: 10.668,3.81 14.859,3.81 16.28,5.231 U4.4
  Top Layer w0.7: M3.2@6.436,4.356 ccw(c7.623,5.374) 7.623,3.81 ; M3.2 7.898,3.81 ; M3.2@6.967,4.812 ccw(c9.145,6.68) 9.145,3.81 ; M3.2@7.09,4.046 cw(c7.278,3.19) 7.898,3.81 ; M3.2@7.498,5.267 ccw(c10.668,7.985) 10.668,3.81 7.898,3.81 ; M3.2@7.662,4.618 ccw(c8.518,4.43) 7.898,3.81
NetMP_1: MP.1 S1.1 | length 57.9
  Bottom Layer w1: MP.1 7.239,23.114 9.398,23.114 19.946,33.662 19.946,34.805 21.336,36.195 34.417,36.195 37.846,32.766 S1.1
NetS0_1: S0.1 U1.9 | length 26.2
  Top Layer w0.3: S0.1 13.208,38.862 14.097,37.973 14.097,30.226 14.859,29.464 14.859,28.321 16.637,26.543 21.463,26.543 22.492,25.514 U1.9 ; S0.1@11.727,38.438 cw(c12.752,37.413) 12.752,38.862 cw(c12.752,40.311) S0.1@11.727,39.286 ; U1.9@22.404,24.706 ccw(c22.19,24.92) 22.492,24.92 ccw(c22.794,24.92) U1.9@22.58,24.706
NetS0_2: S0.2 U1.10 | length 23.1
  Top Layer w0.3: S0.2 12.827,36.322 13.462,35.687 13.462,30.099 14.097,29.464 14.097,28.067 16.256,25.908 21.137,25.908 21.692,25.353 U1.10 ; S0.2@11.727,35.898 cw(c12.752,34.873) 12.752,36.322 cw(c12.752,37.771) S0.2@11.727,36.746 ; U1.10@21.604,24.706 ccw(c21.39,24.92) 21.692,24.92 ccw(c21.994,24.92) U1.10@21.78,24.706
RESET: MP.7 U1.4 | length 47.1
  Top Layer w0.3: v1@24.269,19.558 cw(c25.524,19.558) 24.637,20.446 ; v1(24.384,19.558) 24.384,20.193 26.492,22.301 U1.4 ; v1@24.569,19.558 cw(c26.549,19.558) 25.149,20.958 ; v1@24.869,19.558 cw(c27.573,19.558) 25.661,21.47 ; U1.4@26.404,23.33 cw(c26.19,23.116) 26.492,23.116 cw(c26.794,23.116) U1.4@26.58,23.33
  Bottom Layer w0.3: MP.7@5.175,13.408 cw(c4.262,12.446) 5.588,12.446 ; MP.7 5.588,12.446 ; MP.7@6.001,13.408 ccw(c6.914,12.446) 5.588,12.446 ; v1@24.007,19.253 ccw(c23.368,18.736) 23.368,19.558 ; v1@24.007,19.863 cw(c23.368,20.38) 23.368,19.558 ; v1(24.384,19.558) 23.368,19.558 ; 5.588,12.446 6.731,11.303 8.636,11.303 9.779,10.16 9.779,8.636 10.668,7.747 20.193,7.747 22.86,10.414 22.86,19.05 23.368,19.558
RXD: U1.11 U5.2 | length 18.3
  Top Layer w0.4: v1@19.304,24.457 cw(c19.304,23.407) 20.047,24.149 cw(c20.789,24.892) v1@19.739,24.892 ; v1(19.304,24.892) 20.178,24.018 U1.11
  Bottom Layer w0.4: U5.2 14.891,18.781 16.256,20.146 16.256,23.876 17.272,24.892 v1(19.304,24.892) ; U5.2@13.379,18.498 cw(c14.062,17.815) 14.062,18.781 cw(c14.062,19.747) U5.2@13.379,19.064 ; v1@18.996,24.584 ccw(c18.254,23.842) 18.254,24.892 ccw(c18.254,25.942) v1@18.996,25.2
SCK: MP.3 U1.3 | length 46.7
  Top Layer w0.4: v1@25.981,19.866 ccw(c25.239,20.608) 26.289,20.608 ccw(c27.339,20.608) v1@26.597,19.866 ; v1(26.289,19.558) 26.289,20.955 27.292,21.958 U1.3
  Bottom Layer w0.3: MP.3@5.588,18.323 cw(c5.588,16.874) 6.612,17.899 cw(c7.637,18.923) MP.3@6.188,18.923 ; MP.3 6.731,17.78 6.731,15.875 7.493,15.113 8.636,15.113 9.398,14.351 9.398,11.43 11.049,9.779 14.097,9.779 20.574,16.256 20.574,20.447 22.098,21.971 24.892,21.971 26.289,20.574 ; v1@25.984,19.935 ccw(c25.467,20.574) 26.289,20.574 ; v1(26.289,19.558) 26.289,20.574 ; v1@26.594,19.935 cw(c27.111,20.574) 26.289,20.574
SENS1: Sensors.2 U1.37 | length 28
  Top Layer w0.4: v1(28.321,15.875) 29.214,16.768 U1.37 ; v1@28.321,16.31 ccw(c28.321,17.36) 29.064,16.618 ccw(c29.806,15.875) v1@28.756,15.875
  Bottom Layer w0.5: Sensors.2 29.511,31.195 31.623,29.083 31.623,22.86 28.321,19.558 v1(28.321,15.875) ; Sensors.2@27.024,30.841 cw(c27.877,29.988) 27.877,31.195 cw(c27.877,32.402) Sensors.2@27.024,31.549 ; v1@28.049,16.147 ccw(c27.392,16.804) 28.321,16.804 ccw(c29.25,16.804) v1@28.593,16.147
SENS2: Sensors.1 U1.34 | length 32.5
  Top Layer w0.5: v1@30.335,13.226 ccw(c29.834,13.727) 30.542,13.727 ; 30.542,14.04 ccw(c31.693,14.04) v1@30.879,13.226 ; U1.34 30.542,13.019 v1(30.607,12.954)
  Bottom Layer w0.5: Sensors.1 29.638,33.735 33.147,30.226 33.147,23.114 30.607,20.574 v1(30.607,12.954) ; Sensors.1@27.024,33.381 cw(c27.877,32.528) 27.877,33.735 cw(c27.877,34.942) Sensors.1@27.024,34.089 ; v1@30.335,13.226 ccw(c29.678,13.883) 30.607,13.883 ccw(c31.536,13.883) v1@30.879,13.226
TXD: U1.12 U5.3 | length 17.8
  Top Layer w0.4: v1(17.78,23.622) 18.923,23.622 19.242,23.303 U1.12 ; v1@18.088,23.314 cw(c18.83,22.572) 18.83,23.622 cw(c18.83,24.672) v1@18.088,23.93
  Bottom Layer w0.4: U5.3 14.796,16.781 17.78,19.765 v1(17.78,23.622) ; U5.3@13.379,16.498 cw(c14.062,15.815) 14.062,16.781 cw(c14.062,17.747) U5.3@13.379,17.064 ; v1@17.472,23.314 cw(c16.73,22.572) 17.78,22.572 cw(c18.83,22.572) v1@18.088,23.314
VCC: C2.2 C3.2 L1.2 MP.2 R1.1 R2.1 R3.1 Sensors.3 Sensors.4 U1.5 U1.17 U1.38 U2.4 U3.1 U4.1 U5.1 Vo.1 | length 236.3
  Top Layer w0.3: U3.1@3.872,29.924 ccw(c3.032,30.3) 3.683,30.951 ; 3.991,30.643 cw(c3.458,30.11) U3.1@4.146,29.802 ; U3.1 3.683,30.951 ; MP.2@7.528,21.463 cw(c6.079,21.463) 7.104,20.439 cw(c8.128,19.414) MP.2@8.128,20.863 ; MP.2 6.858,20.193 4.318,20.193 3.556,19.431 3.556,9.017 4.318,8.255 8.636,8.255 9.144,7.747 14.859,7.747 15.425,7.181 U4.1 ; 14.351,39.834 12.871,39.834 12.446,40.259 9.525,40.259 8.89,39.624 8.89,37.465 7.62,36.195 5.762,36.195 3.683,34.116 3.683,30.951
  Top Layer w0.4: U5.1 14.525,20.781 15.922,19.384 15.922,18.368 ; U5.1@13.379,20.498 cw(c14.062,19.815) 14.062,20.781 cw(c14.062,21.747) U5.1@13.379,21.064 ; C3.2@15.755,16.917 ccw(c15.35,17.322) 15.922,17.322 ; 15.922,17.708 ccw(c17.04,17.708) C3.2@16.249,16.917 ; C3.2 15.922,16.75 15.922,18.368 ; L1.2@17.707,10.358 ccw(c17.109,10.956) 17.954,10.956 ccw(c18.799,10.956) L1.2@18.201,10.358 ; L1.2 17.954,11.477 21.082,14.605 21.844,14.605 22.86,15.621 22.86,18.368 ; U1.5 25.692,22.771 22.86,19.939 22.86,18.368 ; U1.38 26.12,17.568 25.32,18.368 22.86,18.368 ; C2.2@38.354,18.669 39.751,18.669 40.513,19.431 40.513,21.844 41.402,22.733 42.291,22.733 42.926,23.368 42.926,29.281 U2.4 U2.4@40.894,29.535 ; C2.2@38.901,18.342 cw(c39.692,17.551) 39.692,18.669 ; C2.2@38.901,18.836 ccw(c39.306,19.241) 39.306,18.669 ; U2.4@40.535,27.6 cw(c38.245,23.518) 42.926,23.518 ; U2.4@40.731,27.949 cw(c38.628,24.201) 42.926,24.201 ; U2.4@40.927,28.298 cw(c39.012,24.884) 42.926,24.884 ; U2.4@41.122,28.647 cw(c39.395,25.567) 42.926,25.567 ; U2.4@41.318,28.995 cw(c39.778,26.25) 42.926,26.25 ; U2.4@41.514,29.344 cw(c40.161,26.933) 42.926,26.933 ; 42.926,26.427 cw(c45.18,26.427) U2.4@43.586,28.021 ; 15.922,18.368 U1.17 22.86,18.368
  Top Layer w0.9: Vo.1@15.324,39.286 cw(c16.646,37.964) 16.646,39.834 ; 15.339,39.834 cw(c15.339,38.824) Vo.1@16.345,38.918 ; Vo.1@15.449,38.834 ccw(c14.351,38.731) 14.351,39.834 37.335,39.834 ; Vo.1@15.96,38.65 cw(c18.819,35.791) 18.819,39.834 ; Sensors.3 24.13,39.834 ; 28.583,39.834 cw(c28.583,37.688) R1.1@30.101,39.206 ; R1.1@30.796,39.206 cw(c32.313,37.688) R2.1@32.313,39.834 ; R1.1@31.266,39.834 cw(c31.266,37.688) R2.1@32.784,39.206 ; R2.1@33.479,39.206 cw(c34.996,37.688) R3.1@34.996,39.834 ; R2.1@33.949,39.834 cw(c33.949,37.688) R3.1@35.467,39.206 ; R3.1@36.199,39.249 cw(c37.335,38.437) 37.335,39.834 ; U2.4@41.038,33.2 ccw(c40.681,34.243) 41.783,34.243 ; U2.4 41.783,34.243 ; U2.4@42.528,33.2 cw(c42.885,34.243) 41.783,34.243 ; 37.335,39.834 37.973,39.196 37.973,36.402 39.116,35.259 40.767,35.259 41.783,34.243
  Bottom Layer w0.5: MP.2 10.287,21.463 ; MP.2@8.482,21.109 cw(c9.335,20.256) 9.335,21.463 cw(c9.335,22.67) MP.2@8.482,21.817 ; 10.873,20.877 ccw(c11.555,21.559) U5.1@11.84,20.638 ; U5.1@11.545,20.537 ccw(c10.969,19.979) 10.969,20.781 ; U5.1@11.545,21.025 cw(c10.969,21.583) 10.969,20.781 ; U5.1@11.692,21.115 cw(c11.278,22.454) 10.287,21.463 ; U5.1 10.969,20.781 ; 10.287,21.463 10.969,20.781
  Bottom Layer w0.9: U5.1 12.446,23.368 16.383,27.305 22.225,27.305 24.13,29.21 Sensors.4 Sensors.3
VIN: C1.2 C9.2 C11.2 S1.2 U2.3 U3.12 U4.12 | length 129.1
  Top Layer w0.3: C9.2@7.163,31.882 cw(c6.673,31.392) 7.366,31.392 ; C9.2@7.192,32.465 7.366,32.291 7.366,28.655 8.707,27.314 U3.12 ; 7.366,31.006 cw(c8.605,31.006) C9.2@7.729,31.882 ; U4.12 26.788,4.581 26.797,4.572 ; 33.02,3.81 36.195,3.81
  Top Layer w0.5: v1@7.221,34.653 cw(c6.677,34.109) 7.446,34.109 ; C9.2@7.234,32.977 ccw(c6.722,33.489) 7.446,33.489 ccw(c8.17,33.489) C9.2@7.658,32.977 ; C9.2 v1@7.446,34.925 ; 7.446,33.882 cw(c8.536,33.882) v1@7.765,34.653 ; 26.797,4.572 30.353,4.572 ; C11.2@30.094,3.56 ccw(c29.582,4.072) 30.306,4.072 ccw(c31.03,4.072) C11.2@30.518,3.56 ; C11.2 30.306,4.525 30.353,4.572 ; v1(32.004,3.048) 32.004,3.175 32.639,3.81 ; v1@32.004,3.433 ccw(c32.004,4.056) 32.444,3.615 ; v1@32.387,3.091 cw(c33.261,3.188) 32.639,3.81 ; 33.02,3.81 32.639,3.81 ; 30.353,4.572 31.877,4.572 32.639,3.81
  Top Layer w0.7: C11.2 v1(32.004,3.048) ; v1@31.802,2.846 ccw(c31.316,2.36) 31.316,3.048 ccw(c31.316,3.736) v1@31.802,3.25
  Top Layer w0.9: 36.195,3.81 36.703,3.81 37.973,5.08 37.973,6.985 41.878,10.89 41.878,16.097 42.625,16.844 43.514,16.844 44.577,17.907 44.577,20.908 44.116,21.369 ; S1.2 41.878,12.78 ; S1.2@38.129,12.497 cw(c38.812,11.814) 38.812,12.78 cw(c38.812,13.746) S1.2@38.129,13.063 ; C1.2 44.116,21.369 ; U2.3 44.063,21.422 44.116,21.369
  Bottom Layer w0.4: 10.922,3.81 10.951,3.781 14.957,3.781
  Bottom Layer w0.7: v1@7.291,34.723 ccw(c6.805,34.237) 6.805,34.925 ccw(c6.805,35.613) v1@7.291,35.127 ; v1(7.493,34.925) 5.461,34.925 2.667,32.131 2.667,8.382 4.583,6.466 7.758,6.466 10.414,3.81 10.922,3.81 ; 14.957,3.781 17.624,3.781 18.415,4.572 26.67,4.572 28.194,3.048 v1(32.004,3.048) ; v1@31.802,2.846 ccw(c31.316,2.36) 31.316,3.048 ccw(c31.316,3.736) v1@31.802,3.25
pads on no net: S1.0 U1.21 U1.22 U1.23 U1.24 U1.30 U1.31 U1.32 U1.33 U1.35 U1.36 U1.40 U1.41 U1.42 U3.8 U4.5 U4.7 U4.8 U4.9 U4.10 U5.4 U5.5 U5.6 U5.7 U5.8 U5.9 U5.11 U5.12 U5.13 U5.14 U5.15 U5.16 U5.17 U5.18 U5.19 U5.20

## Polygon pours and split planes (outlines as drawn)
GND on Bottom Layer "Bottom Layer-No Net" (solid, pour order 2): 0.254,42.037 0.381,42.164 46.482,42.164 46.482,0.381 46.355,0.254 0.127,0.254
no net on Internal Plane 1 (split plane): 45.591,1.272 1.145,1.272 1.145,41.146 45.591,41.146
no net on Internal Plane 2 (split plane): 45.591,1.272 1.145,1.272 1.145,41.146 45.591,41.146

## Keep-outs
Keep-Out Layer:
  lines w0.3: 0,0 46.736,0 46.736,42.291 0,42.291 0,0

## Other copper
Top Layer:
  rectangle net GND: 33.227,23.495 38.18,25.146
  region net GND: 32.812,23.247 33.516,24.099 33.018,24.511 32.313,23.659
  region net GND: 32.309,26.212 34.215,24.306 34.99,25.081 33.084,26.987
  region net GND: 37.28,24.211 38.859,23.321 39.599,24.636 38.02,25.526
  region net GND: 36.83,24.511 37.719,25.4 37.397,25.722 36.508,24.833
  region net GND: 6.032,26.607 6.455,27.029 6.276,27.209 5.853,26.786
  region net GND: 6.301,26.949 6.627,26.579 6.818,26.746 6.491,27.117
  region net GND: 21.811,32.005 22.287,32.425 22.098,32.639 21.622,32.218
  region net GND: 21.702,32.781 21.971,32.512 22.162,32.703 21.892,32.972
  region net GND: 32.512,26.162 33.06,25.614 33.329,25.883 32.781,26.431
  region net GND: 32.84,26.206 33.329,26.695 33.06,26.964 32.571,26.475
  region net VCC: 15.743,17.912 16.065,17.59 16.661,18.185 16.339,18.507
  region net VCC: 15.739,18.901 16.368,18.273 16.637,18.542 16.008,19.171
  region net GND: 22.485,4.451 23.114,5.08 22.845,5.349 22.216,4.721
  region net GND: 22.289,5.652 22.848,5.092 23.11,5.354 22.55,5.913
  region net GND: 21.696,3.847 22.33,4.64 22.098,4.826 21.463,4.033
  region net GND: 21.594,5.75 22.322,6.478 22.083,6.716 21.356,5.989
  region net VCC: 21.962,18.415 22.86,17.517 23.758,18.415 22.86,19.313
  region net VIN: 40.686,12.537 41.783,11.303 42.353,11.809 41.256,13.043
  rectangle net VIN: 41.402,12.192 41.529,12.446
  region net VIN: 41.117,12.533 42.105,13.521 41.656,13.97 40.668,12.982
  region net VCC: 24.511,38.354 25.604,39.447 25.033,40.019 23.94,38.925
  region net VCC: 22.643,39.492 23.81,38.324 24.308,38.822 23.14,39.989
  region net GND: 21.38,5.798 22.142,5.036 22.415,5.31 21.654,6.072
  region net GND: 22.463,7.001 23.352,7.89 22.813,8.429 21.924,7.54
  region net GND: 21.082,7.874 21.971,6.985 22.51,7.524 21.621,8.413
Bottom Layer:
  region net BATTERY: 37.465,4.953 38.183,5.671 37.418,6.437 36.7,5.718

## Dimensions
0,0 to 46.736,0 on Mechanical 1
0,0 to 0,42.291 on Mechanical 1

## Text inside footprints (layer, text, board x,y; h text height)
MP: Top Overlay "2" at 7.62,23.495 h1.27 r270; Top Overlay "1" at 5.08,23.495 h1.27 r270; Top Overlay "7" at 5.08,12.319 h1.27 r270; Top Overlay "8" at 7.62,12.319 h1.27 r270
Sensors: Top Overlay "6" at 20.066,31.703 h1.27 r180; Top Overlay "5" at 20.066,34.243 h1.27 r180; Top Overlay "1" at 28.702,34.243 h1.27 r180; Top Overlay "2" at 28.702,31.703 h1.27 r180